# EAGLE board flightComputerD (EAGLE 7.2.0)
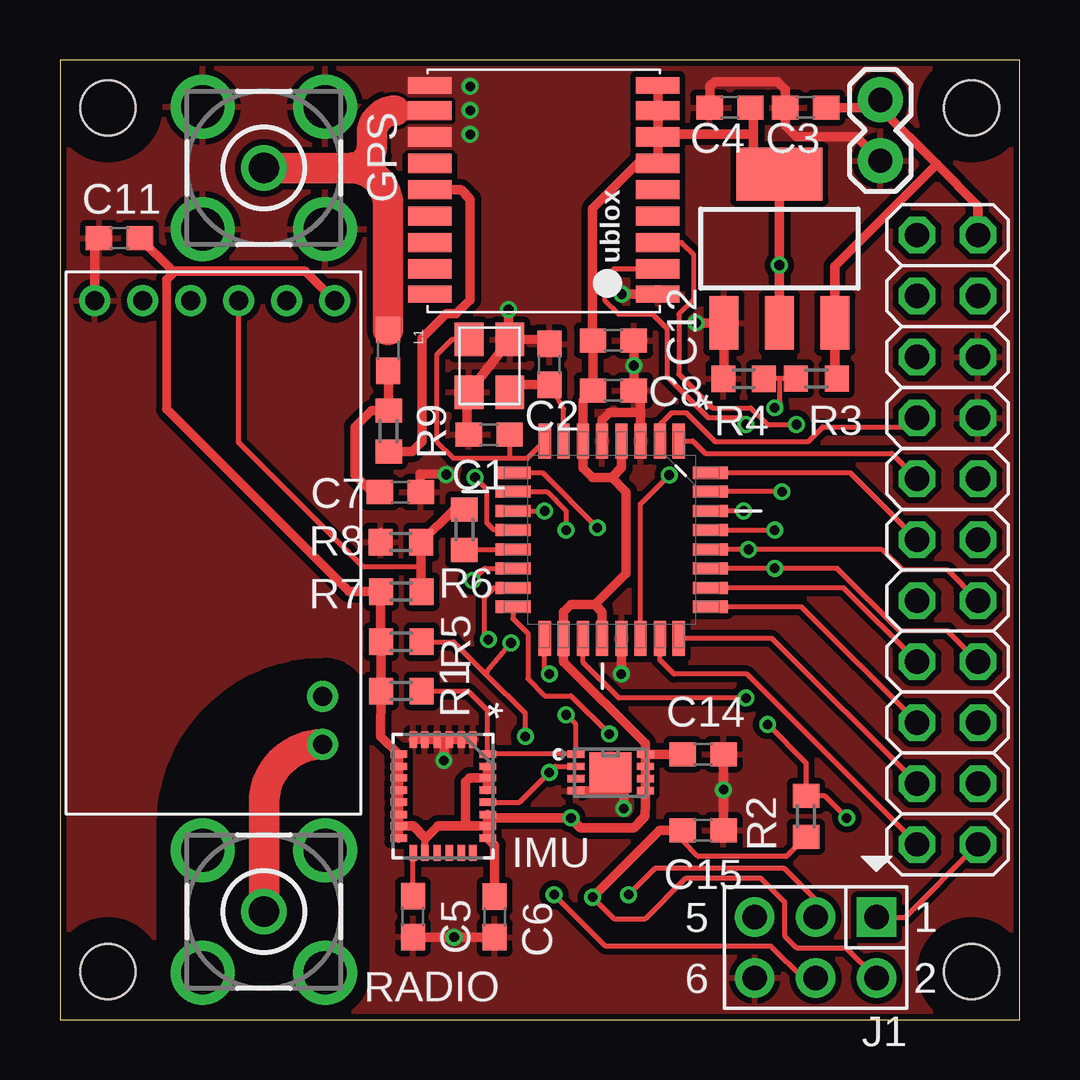
[diagram p0: board, top side]
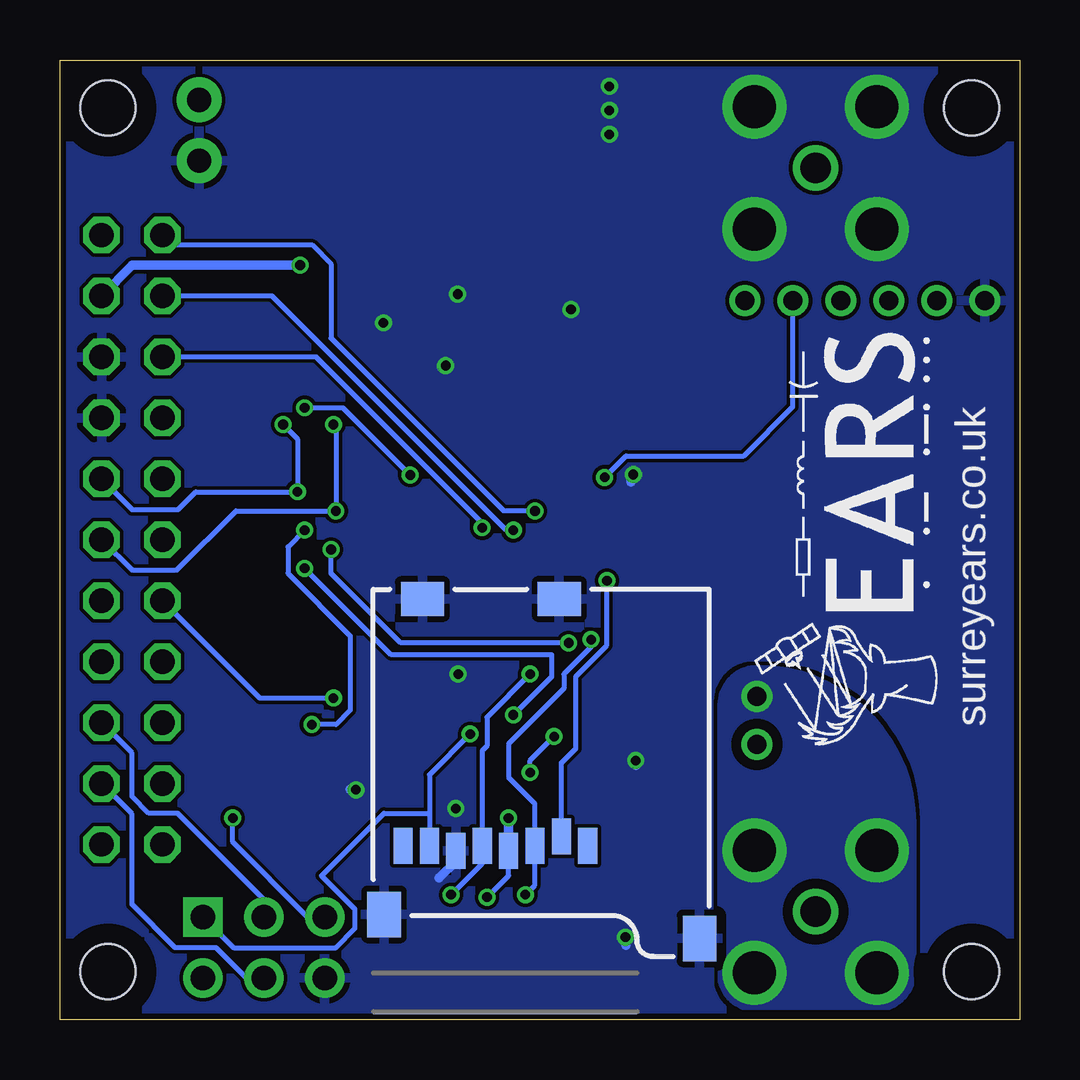
[diagram p1: board, bottom side, seen from below]

Size 40 x 40 mm. Coordinates in mm from the lower left corner, seen from the top.
Outline: 0,0 40,0 40,40 0,40 0,0
Copper layers (1*16): Top 0.035mm / dielectric 1.5mm / Bottom 0.035mm
Design rules "SeeedStudio_2layer_DRU_no_angle_20140221": minimum track width 6mil, minimum drill 12mil, track to track 6mil, track to pad 6mil, pad to pad 6mil, via to via 6mil, smd to smd 0mil, copper to edge 10mil, drill to drill 10mil, minimum pad ring 10mil, minimum via ring 6mil, stop-mask expansion 2mil, vias tented up to drill 100mil, thermal gap 10mil
Holes 2.3 mm at 2,2 2,38 38,38 38,2
tRestrict: area 0,36 to 4,40; area 0,0 to 4,4; area 36,0 to 40,4; area 36,36 to 40,40; 9 lines
bRestrict: area 0,36 to 4,40; area 0,0 to 4,4; area 36,0 to 40,4; area 36,36 to 40,40

## Footprints (pad centres in the part's own frame; a part is rotated, then mirrored left to right if it is on the bottom)
C0603 = smd 1.1 x 1: 1 -0.85,0; 2 0.85,0
BU-SMA-V = drill 1.27: 1 0,0 | drill 1.778: 2 -2.55,2.55; 3 2.55,2.55; 4 2.55,-2.55; 5 -2.55,-2.55
SOT223 = smd 1.219 x 2.235: 1 -2.311,-3.099; 2 0,-3.099; 3 2.311,-3.099 | smd 3.6 x 2.2: 4 0,3.099
LGA28R50P6X8_400X500X110 = smd 0.686 x 0.305: 1 -2.362,1.245; 2 -2.362,0.762; 3 -2.362,0.254; 4 -2.362,-0.254; 5 -2.362,-0.762; 6 -2.362,-1.245; 15 2.362,-1.245; 16 2.362,-0.762; 17 2.362,-0.254; 18 2.362,0.254; 19 2.362,0.762; 20 2.362,1.245 | smd 0.305 x 0.686: 7 -1.753,-1.854; 8 -1.245,-1.854; 9 -0.762,-1.854; 10 -0.254,-1.854; 11 0.254,-1.854; 12 0.762,-1.854; 13 1.245,-1.854; 14 1.753,-1.854; 21 1.753,1.854; 22 1.245,1.854; 23 0.762,1.854; 24 0.254,1.854; 25 -0.254,1.854; 26 -0.762,1.854; 27 -1.245,1.854; 28 -1.753,1.854
HEADER_PRG_2X03 = drill 1.02 pad 1.632 square: 1 -2.54,-1.27 | drill 1.02 pad 1.632: 2 -2.54,1.27; 3 0,-1.27; 4 0,1.27; 5 2.54,-1.27; 6 2.54,1.27
2X11 = drill 1.016 octagon: 1 -12.7,-1.27; 2 -12.7,1.27; 3 -10.16,-1.27; 4 -10.16,1.27; 5 -7.62,-1.27; 6 -7.62,1.27; 7 -5.08,-1.27; 8 -5.08,1.27; 9 -2.54,-1.27; 10 -2.54,1.27; 11 0,-1.27; 12 0,1.27; 13 2.54,-1.27; 14 2.54,1.27; 15 5.08,-1.27; 16 5.08,1.27; 17 7.62,-1.27; 18 7.62,1.27; 19 10.16,-1.27; 20 10.16,1.27; 21 12.7,-1.27; 22 12.7,1.27
1X02 = drill 1.016 pad 1.88: 1 0,0; 2 2.54,0
0603 = smd 1.1 x 1: 1 -0.85,0; 2 0.85,0
R0603 = smd 1 x 1.1: 1 -0.85,0; 2 0.85,0
DFN300X200X100-9N = smd 0.711 x 0.305: 1 -1.448,0.762; 2 -1.448,0.254; 3 -1.448,-0.254; 4 -1.448,-0.762; 5 1.448,-0.762; 6 1.448,-0.254; 7 1.448,0.254; 8 1.448,0.762 | smd 1.753 x 1.651: 9 0,0
QFP80P900X900X120-32N = smd 1.473 x 0.508: 1 -4.115,2.794; 2 -4.115,2.007; 3 -4.115,1.194; 4 -4.115,0.406; 5 -4.115,-0.406; 6 -4.115,-1.194; 7 -4.115,-2.007; 8 -4.115,-2.794; 17 4.115,-2.794; 18 4.115,-2.007; 19 4.115,-1.194; 20 4.115,-0.406; 21 4.115,0.406; 22 4.115,1.194; 23 4.115,2.007; 24 4.115,2.794 | smd 0.508 x 1.473: 9 -2.794,-4.115; 10 -2.007,-4.115; 11 -1.194,-4.115; 12 -0.406,-4.115; 13 0.406,-4.115; 14 1.194,-4.115; 15 2.007,-4.115; 16 2.794,-4.115; 25 2.794,4.115; 26 2.007,4.115; 27 1.194,4.115; 28 0.406,4.115; 29 -0.406,4.115; 30 -1.194,4.115; 31 -2.007,4.115; 32 -2.794,4.115
MICRO-SD-SOCKET-PP = smd 0.8 x 1.5: 1 -8.94,10.7; 2 -7.84,10.3; 3 -6.74,10.7; 4 -5.64,10.9; 5 -4.54,10.7; 6 -3.44,10.9; 7 -2.34,10.7; 8 -1.24,10.7 | smd 1.8 x 1.4: CD1 -2.05,0.4; CD2 -7.75,0.4 | smd 1.4 x 1.9: GND1 -13.6,14.55; GND3 -0.45,13.55
CRYSTAL = smd 1.4 x 1.2: 1CON 0.7,-2.3; 2GND 2.9,-2.3; 3CON 2.9,-0.6; 4GND 0.7,-0.6
UBLOX_MAX = smd 1.8 x 0.7: 1_GND 4.95,-4.4; 9_V_RESET 4.95,4.3; 10_GND -4.55,4.3; 18_RESERVED -4.55,-4.4 | smd 1.8 x 0.8: 2_TXD1 4.95,-3.35; 3_RXD1 4.95,-2.25; 4_TIMEPULSE 4.95,-1.15; 5_EXTINT0 4.95,-0.05; 6_V_BCKP 4.95,1.05; 7_VCC_IO 4.95,2.15; 8_VCC 4.95,3.25; 11_RF_IN -4.55,3.25; 12_GND -4.55,2.15; 13_ANTON -4.55,1.05; 14_VCC_RF -4.55,-0.05; 15_RESERVED -4.55,-1.15; 16_SDA2 -4.55,-2.25; 17_SCL2 -4.55,-3.35
RADIOMETRIX-MTX2 = drill 0.8: EN 9.97,-3.25; GND 9.97,4.75; P0 9.97,2.75; P1 9.97,0.75; RF -8.53,-4.75; RFGND -6.53,-4.75; TXD 9.97,-1.25; VCC 9.97,-5.25

## Placement (x,y rotation side)
C1  22p  [C0603]  17.89,24.38 180 top
C2  22p  [C0603]  20.4,27.31 90 top
C3  10uF  [C0603]  31.08,38.02 180 top
C4  10uF  [C0603]  27.93,38.02 180 top
C5  10n  [C0603]  14.71,4.29 270 top
C6  100n  [C0603]  18.12,4.28 270 top
C7  22p  [C0603]  14.19,21.98 0 top
C8  100n  [C0603]  23.07,26.22 0 top
C11  100n  [C0603]  2.48,32.58 180 top
C12  100n  [C0603]  23.07,28.31 0 top
C14  100n  [C0603]  26.81,11.06 0 top
C15  100n  [C0603]  26.81,7.89 0 top
GPS  BU-SMA-V  [BU-SMA-V]  8.5,35.5 0 top
IC1  [SOT223]  29.99,32.14 0 top
IMU  LSM330DLC  [LGA28R50P6X8_400X500X110]  15.97,9.31 270 top
J1  CON_HEADER_PRG_AVR_ICSP-PTH  [HEADER_PRG_2X03]  31.5,3 180 top
JP1  [2X11]  37,20 270 top
JP2  [1X02]  34.2,35.8 90 top
L1  33nH  [0603]  13.68,27.89 270 top
R1  4.7k  [R0603]  14.23,13.69 0 top
R2  10k  [R0603]  31.1,8.47 90 top
R3  10k  [R0603]  31.53,26.72 0 top
R4  10k  [R0603]  28.5,26.71 0 top
R5  4.7k  [R0603]  14.23,15.75 0 top
R6  0R  [R0603]  16.86,20.42 90 top
R7  DNF  [R0603]  14.23,17.84 180 top
R8  DNF  [R0603]  14.21,19.9 0 top
R9  10R  [R0603]  13.7,24.53 270 top
RADIO  BU-SMA-V  [BU-SMA-V]  8.5,4.5 0 top
TEMP  MCP9808T-E/MC  [DFN300X200X100-9N]  22.95,10.3 0 top
U1  ATMEGA328P-AU  [QFP80P900X900X120-32N]  23,20 270 top
U3  USD-SOCKETNEW  [MICRO-SD-SOCKET-PP]  26.94,17.93 180 bottom
U$1  CRYSTAL  [CRYSTAL]  16.45,25.45 90 top
U$4  UBLOX_MAX  [UBLOX_MAX]  19.97,34.64 0 top
U$6  RADIOMETRIX-MTX2  [RADIOMETRIX-MTX2]  6.2,20 90 top

## Library data of the parts
C1 C2 C7 = rcl; OC_FARNELL: 2309012
C3 C4 = rcl; OC_FARNELL: 2426958
C5 = rcl; OC_FARNELL: 2066471
C6 C8 C11 C12 C14 C15 = rcl; OC_FARNELL: 2429362
GPS RADIO = con-coax; OC_FARNELL: 2144531; OC_NEWARK: unknown
IC1 = SparkFun; OC_FARNELL: 1651283
IMU = mattsLib; MPN: LSM330DLC; OC_FARNELL: 2295820; OC_NEWARK: 68W6732; PACKAGE: LGA-28L; SUPPLIER: STMicroelectronics
J1 = dp_devices; OC_FARNELL: 2311147
JP1 = pinhead
JP2 = SparkFun
L1 = SparkFun; OC_FARNELL: 2285904
R1 R5 R7 R8 = rcl; OC_FARNELL: 1799457
R2-R4 = rcl; OC_FARNELL: 1652827
R6 = rcl; OC_FARNELL: 2309106
R9 = rcl; OC_FARNELL: 2321756
TEMP = mattsLib; MPN: MCP9808T-E/MC; OC_FARNELL: 2080524; OC_NEWARK: 73T0714; PACKAGE: 8DFN; SUPPLIER: Microchip
U1 = Atmel_By_element14_Batch_1-00; MPN: ATMEGA328P-AU; OC_FARNELL: 1715486; OC_NEWARK: 14R4631; PACKAGE: TQFP-32; SUPPLIER: Atmel
U3 = SparkFun; OC_FARNELL: 2443092
U$1 = mattsLib; OC_FARNELL: 1842060
U$4 U$6 = Ava

## Nets
A0: JP1.21 U1.23
A1: JP1.19 U1.24
A2: JP1.17 U1.25
A3: JP1.15 U1.26
A6: JP1.13 U1.19
A7: R3.1 R4.2 U1.22
D2: JP1.11 U1.32
D3: JP1.9 U1.1
D4: JP1.7 U1.2
D5: JP1.5 U1.9
D6: JP1.3 U1.10
D7: JP1.1 U1.11
D8: U1.12 U$6.EN
D9: R6.1 U1.13
D10: U1.14 U3.2
GND: C1.2 C2.2 C3.2 C4.2 C5.2 C6.2 C7.2 C8.2 C11.2 C12.2 C14.2 C15.2 GPS.2 GPS.3 GPS.4 GPS.5 IC1.1 IMU.1 IMU.2 IMU.3 IMU.4 IMU.5 IMU.6 J1.6 JP1.6 JP1.8 JP2.1 R4.1 R8.1 TEMP.4 TEMP.9 U1.3 U1.5 U1.21 U3.6 U3.CD1 U3.CD2 U3.GND1 U3.GND3 U$1.2GND U$1.4GND U$4.1_GND U$4.10_GND U$4.12_GND U$6.GND
MISO: J1.1 JP1.22 U1.16 U3.7
MOSI: J1.4 JP1.20 U1.15 U3.3
N$1: GPS.1 L1.1 U$4.11_RF_IN
N$2: C1.1 U1.8 U$1.3CON
N$3: R9.2 U$4.14_VCC_RF
N$4: C2.1 U1.7 U$1.1CON
N$6: RADIO.1 U$6.RF
N$7: R6.2 R7.1 R8.2 U$6.TXD
N$8: C7.1 L1.2 R9.1
N$12: C5.1 IMU.15
RFGND: RADIO.2 RADIO.3 RADIO.4 RADIO.5 U$6.RFGND
RST: J1.5 R2.2 U1.29
RXD: JP1.12 U1.30 U$4.2_TXD1
SCK: J1.3 JP1.18 U1.17 U3.5
SCL: IMU.24 JP1.14 R5.2 TEMP.2 U1.28
SDA: IMU.28 JP1.16 R1.2 TEMP.1 U1.27
TXD: JP1.10 U1.31 U$4.3_RXD1
V+: C3.1 IC1.3 JP1.2 JP2.2 R3.2
VCC: C4.1 C6.1 C8.1 C11.1 C12.1 C14.1 C15.1 IC1.2 IC1.4 IMU.7 IMU.8 IMU.9 IMU.10 IMU.11 IMU.12 IMU.13 IMU.14 IMU.16 IMU.21 IMU.22 IMU.23 IMU.25 IMU.26 IMU.27 J1.2 JP1.4 R1.1 R2.1 R5.1 R7.2 TEMP.5 TEMP.6 TEMP.7 TEMP.8 U1.4 U1.6 U1.18 U1.20 U3.4 U$4.6_V_BCKP U$4.7_VCC_IO U$4.8_VCC U$4.9_V_RESET U$6.VCC

## Tracks (layer width: path | path; a pad name or v marks a point on that pad's centre or on a via)
A0
  Top 0.2: JP1.21 28.63,14.4 25.6,14.4 25.01,14.99 U1.23
A1
  Top 0.2: JP1.19 29.68,15.88 U1.24
A2
  Top 0.2: JP1.17 30.9,17.21 U1.25
A3
  Top 0.2: JP1.15 32.66,17.99 U1.26
A6  (via drill 0.4)
  Top 0.2: v28.6,13.4 23.3,13.4 21.81,14.89 U1.19
  Bottom 0.2: JP1.13 31.67,13.4 v28.6,13.4
A7  (via drill 0.4)
  Top 0.2: R3.1 30.04,26.71 | 30.04,26.71 R4.2 | U1.22 24.19,21.49 v25.4,22.7 | v29.8,25.5 30.02,25.72 30.02,26.69 30.04,26.71
  Bottom 0.2: v25.4,22.7 28.2,25.5 v29.8,25.5
D2
  Top 0.2: U1.32 32.94,22.79 JP1.11
D3
  Top 0.2: U1.1 26.39,24.11 26.9,23.6 34.67,23.6 JP1.9
D4
  Top 0.2: U1.2 25.01,24.81 25.5,25.3 26.1,25.3 27.3,24.1 31.2,24.1 31.8,24.7 35.35,24.7 JP1.7
D5  (via drill 0.4)
  Top 0.2: U1.9 20.11,22.79 v22.4,20.5
  Bottom 0.2: v22.4,20.5 22.4,20.7 29.32,27.62 JP1.5
D6  (via drill 0.4)
  Top 0.2: U1.10 20.29,22.01 21.1,21.2 v21.1,20.4
  Bottom 0.2: v21.1,20.4 21.4,20.4 31.16,30.16 JP1.3
D7  (via drill 0.4)
  Top 0.2: U1.11 20.09,21.19 v20.2,21.2
  Bottom 0.2: JP1.1 35.33,32.3 29.5,32.3 28.7,31.5 28.7,28.4 21.5,21.2 v20.2,21.2
D8  (via drill 0.4)
  Top 0.2: U1.12 18.09,20.41 17.8,20.7 17.8,22.1 v17.3,22.6
  Bottom 0.2: v17.3,22.6 16.4,23.5 11.5,23.5 9.45,25.55 U$6.EN
D9
  Top 0.2: U1.13 18.86,19.57 R6.1
D10  (via drill 0.4)
  Top 0.2: v17.2,18.3 17.71,18.81 U1.14
  Bottom 0.2: U3.2 19.1,10.7 18.5,11.3 18.5,14.3 17.2,15.6 v17.2,18.3
GND  (via drill 0.4)
  Top 0.4: JP2.1 33.2,36.8 30.7,36.8 30.23,37.27 C3.2 30.23,38.77 29.9,39.1 27.3,39.1 27.1,38.9 27.1,38.04 C4.2 | v26.52,29.04 IC1.1 27.68,26.74 R4.1 | IMU.1 IMU.2 IMU.3 15.97,11.67 | 15.97,11.67 IMU.4 IMU.5 IMU.6 | 15.97,11.67 16,11.64 v16,10.8 | C5.2 v16.43,3.43 C6.2 | C15.2 v27.66,9.58 C14.2 | U1.3 24.19,25.3 | 24.19,25.3 24.19,25.95 C8.2 v23.92,27.26 C12.2 | U1.5 22.59,24.99 22.9,25.3 24.19,25.3 | U1.21 23.4,15.88 v23.4,14.4 | U$1.2GND 20.34,28.36 C2.2 | U$1.2GND U$1.4GND 16.96,26.04 16.96,24.46 C1.2 | U$1.2GND 18.7,28.4 v18.7,29.6 | C7.2 15.02,22.73 v16.1,22.72 | R8.1 13.36,20.3 | C11.2 arc90 1.45,32.4 U$6.GND | TEMP.4 22.19,9.54 | 22.19,9.54 TEMP.9 | 22.19,9.54 23.5,9.54 v23.5,8.8 | U$4.1_GND v23.42,30.24
  Bottom 0.4: v16,10.8 16,10.6 | v16.43,3.43 16.4,3.4 16.4,3.1 | v27.66,9.58 27.68,9.6 27.9,9.6 | v18.7,29.6 18.7,29.7 | v16.1,22.72 16.2,22.4 | v23.5,8.8 23.4,8.7 | U3.6 23.5,6.6 24.2,5.9 | v23.42,30.24 23.54,30.24 23.5,30.2 | v23.92,27.26 24.04,27.26 24.1,27.2
  other vias: 17.1,36.9 17.1,37.9 17.1,38.9
  pour Bottom (rank 2): 0,0 40,0 40,40 0,40
  pour Top (no thermals): 13.6,39.7 17.9,39.7 17.9,36.2 13.6,36.2
  pour Bottom (no thermals): 4.4,40 18,40 18,35.9 12.8,35.9 12.8,31.2 4.4,31.2
  pour Top (isolate 0.254): 0,0 40,0 40,40 0,40
MISO  (via drill 0.4)
  Top 0.2: J1.1 35.24,4.27 JP1.22 | v22.9,11.9 21.3,13.5 20.2,13.5 19.5,14.2 19.5,16.1 18.89,16.71 U1.16
  Bottom 0.2: J1.1 32.77,3 28.5,3 27.7,3.8 27.7,4.6 29.1,6 26.5,8.6 24.6,8.6 | 24.6,8.6 U3.7 | v22.9,11.9 24.6,10.2 24.6,8.6
MOSI  (via drill 0.4)
  Top 0.2: J1.4 31.47,1.7 31,1.7 29.64,3.06 22.74,3.06 v20.6,5.2 | v17.86,15.84 17.7,16 17.7,17.6 18.09,17.99 U1.15
  Bottom 0.2: 31.47,1.7 J1.4 32.23,1.73 33.5,3 35.2,3 37,4.8 37,8.57 JP1.20 | v20.6,5.2 20.2,5.6 U3.3 20.2,9 21.3,10.1 21.3,11.5 19,13.8 19,14.4 17.86,15.54 v17.86,15.84
N$1
  Top 0.8: 13.96,37.88 U$4.11_RF_IN arc90 U$4.11_RF_IN
  Top 1.27: GPS.1 12.1,35.5 | 12.1,35.5 arc90 13,36.4 13,36.92 arc-90 13.96,37.88 | 12.1,35.5 arc-90 13.68,33.92 L1.1
N$2
  Top 0.2: U$1.3CON 16.35,28.35 15.7,27.7 15.7,24.1 16.4,23.4 18.7,23.4 | 18.7,23.4 19.49,23.4 U1.8 | C1.1 18.74,23.44 18.7,23.4
N$3
  Top 0.4: U$4.14_VCC_RF 16.71,34.59 17.1,34.2 17.1,30 16.51,29.42 16.11,29.42 15.1,28.4 15.1,24.1 14.68,23.68 R9.2
N$4
  Top 0.2: U1.7 20.99,25.47 C2.1
  Top 0.4: C2.1 18.77,26.47 U$1.1CON
N$6
  Top 1.27: U$6.RF arc90 8.5,9.02 RADIO.1
N$7
  Top 0.2: 15.06,18.87 12.63,18.87 7.45,24.05 U$6.TXD
  Top 0.4: R6.2 16.43,21.27 R8.2 15.06,18.87 15.06,17.86 R7.1
N$8
  Top 0.4: L1.2 arc-90 13.7,27.02 R9.1 12.98,25.38 12.3,24.7 12.3,22.7 12.9,22.1 13.22,22.1 C7.1
N$12
  Top 0.2: C5.1 14.72,5.16 IMU.15
RFGND
  pour Bottom (isolate 0.406, no thermals): 10.9,14.6 arc90 4.5,8.2 4.5,2 arc90 6,0.5 11,0.5 arc90 12.4,1.9 12.4,7.2 12.4,13.1 arc90
RST  (via drill 0.4)
  Top 0.2: U1.29 v29.79,20.41 v29.8,20.4 | v29.5,12.3 31.1,10.7 R2.2 31.88,9.32 v32.8,8.4
  Bottom 0.2: v29.8,20.4 30.5,19.7 30.5,18.6 27.9,16 27.9,12.9 28.5,12.3 v29.5,12.3 | J1.5 29.67,4.27 32.8,7.4 v32.8,8.4
RXD  (via drill 0.4)
  Top 0.2: v28.5,21.2 v28.51,21.19 U1.30 | U$4.2_TXD1 23.09,31.29 22.7,30.9 22.7,30 23.3,29.4 24.7,29.4 25.3,28.8 25.3,26.8 27,25.1 28.4,25.1 28.6,24.9 v28.6,24.8
  Bottom 0.2: JP1.12 37,18.73 35.13,18.73 32.66,21.2 v28.5,21.2 | 28.6,21.3 v28.5,21.2 | v28.6,24.8 28.5,24.7 v28.5,21.2
SCK  (via drill 0.4)
  Top 0.2: J1.3 31.5,5 30.2,6.3 24.8,6.3 v23.7,5.2 | v20.4,14.4 20.21,14.59 U1.17
  Bottom 0.2: J1.3 31.5,5 35.1,8.6 36.3,8.6 37,9.3 37,11.11 JP1.18 | v23.7,5.2 22.4,6.5 U3.5 22.4,11.2 22.2,11.4 22.2,12.6 v20.4,14.4
SCL  (via drill 0.4)
  Top 0.2: JP1.14 37,18.73 35.13,18.73 34.27,19.59 v28.7,19.59 U1.28 | IMU.24 19.16,9.06 v20.4,10.3 20.65,10.55 TEMP.2 | v19.4,11.8 19.4,12.76 17.81,14.35 | R5.2 16.41,15.75 17.81,14.35 | 17.81,14.35 17.81,14.51 v18.8,15.7
  Bottom 0.2: v28.7,19.59 28.7,18.6 25.8,15.7 v18.8,15.7 | v20.4,10.3 20.4,10.8 v19.4,11.8
SDA  (via drill 0.4)
  Top 0.2: JP1.16 36.99,16.2 35,16.2 32.39,18.81 v29.8,18.81 U1.27 | R1.2 17.01,13.69 17.82,12.88 IMU.28 TEMP.1 21.5,12.3 v21.1,12.7
  Bottom 0.2: v21.1,12.7 19.5,14.3 19.5,15.2 26.19,15.2 v29.8,18.81
TXD  (via drill 0.4)
  Top 0.2: v30.1,22 v30.09,22.01 U1.31 | U$4.3_RXD1 25.91,32.39 26.4,31.9 26.4,30 25.8,29.4 25.8,26.9 27.2,25.5 28.8,25.5 29.5,24.8 v30.7,24.8
  Bottom 0.2: JP1.10 36.99,21.26 35.08,21.26 34.34,22 v30.1,22 30.1,24.2 v30.7,24.8
V+
  Top 0.4: C3.1 33.88,38.02 JP2.2 34.2,38 36.55,35.65 | 36.55,35.65 38.27,33.93 JP1.2 | 36.55,35.65 32.3,31.4 IC1.3 32.3,26.8 R3.2
VCC  (via drill 0.4)
  Top 0.2: J1.2 32.77,3 30.7,3 30.2,3.5 30.2,4.9 29.2,5.9 26.1,5.9 24.4,4.2 23.1,4.2 v22.2,5.1 | R2.1 30.28,6.8 26.6,6.8 25.96,7.44 C15.1
  Top 0.3: IMU.16 15.21,7.59 15.24,7.56
  Top 0.35: 4.45,30.85 4.45,25.45
  Top 0.4: C4.1 28.9,37.9 28.9,36.9 | 28.9,36.9 28.9,35.7 29.53,35.7 IC1.4 v29.99,31.45 IC1.2 | U$4.7_VCC_IO U$4.6_V_BCKP 24.09,35.69 22.2,33.8 22.2,28.25 C12.1 C8.1 21.81,25.81 U1.6 21.81,22.99 22.2,22.6 23,22.6 | U$4.7_VCC_IO U$4.8_VCC U$4.9_V_RESET | 28.9,36.9 25.03,36.9 U$4.7_VCC_IO | IMU.13 IMU.12 IMU.11 IMU.10 IMU.9 IMU.8 IMU.7 13.37,11.8 R1.1 R5.1 13.37,16.75 R7.2 12.06,17.84 4.45,25.45 | IMU.13 IMU.14 | IMU.13 14.73,8.06 15.21,7.59 | 15.24,7.56 15.75,8.06 16.91,8.06 | 16.91,8.06 IMU.22 | IMU.22 IMU.21 18.12,7.26 C6.1 | IMU.22 17.82,8.4 | 17.82,8.4 IMU.23 | 16.91,8.06 16.9,8.07 16.9,9.9 17.07,10.07 IMU.26 | IMU.26 IMU.27 | IMU.26 IMU.25 | 17.82,8.4 17.83,8.4 v21.3,8.4 21.7,8 23.93,8 24.39,8.46 24.4,9 TEMP.5 TEMP.6 TEMP.7 TEMP.8 | v22.2,5.1 24.99,7.89 C15.1 | C14.1 TEMP.8 | 23,22.6 23.41,23.01 U1.4 | 22.3,17.3 21.3,17.3 20.99,16.99 U1.18 20.99,14.91 24.4,11.5 TEMP.8 | 22.3,17.3 22.6,17 U1.20 | C11.1 4.71,31.2 4.8,31.2 | 4.8,31.2 10.22,31.2 U$6.VCC | 4.8,31.2 4.45,30.85 | 22.3,17.3 23.6,18.6 23.6,22 23,22.6
  Bottom 0.2: v22.2,5.1 21.3,6 U3.4
  Bottom 0.4: JP1.4 36.99,31.44 v29.99,31.44 v29.99,31.45 | v21.3,8.4 U3.4

## Text on the board
bPlace: surreyears.co.uk